# EAGLE board GS - Edge (EAGLE 9.7.0)

Size 154.23 x 121.79 mm. Coordinates in mm from the lower left corner, seen from the top.
Outline: 0,0 154.23,0 154.23,121.79 0,121.79 0,0
Copper layers (1*16): Top 0.035mm / dielectric 1.5mm / Bottom 0.035mm
Design rules "default": minimum track width 6mil, minimum drill 0.35mm, track to track 6mil, track to pad 6mil, pad to pad 6mil, via to via 6mil, smd to smd 6mil, copper to edge 40mil, drill to drill 6mil, minimum pad ring 10mil, minimum via ring 8mil, stop-mask expansion 4mil, vias tented up to drill 0mil, thermal gap 10mil

## Footprints (pad centres in the part's own frame; a part is rotated, then mirrored left to right if it is on the bottom)
LEDRD254W60D565H860B_Y = drill 0.981 pad 1.581: 1 -1.27,0; 2 1.27,0
LEDRD254W60D565H860B = drill 0.981 pad 1.581: 1 -1.27,0; 2 1.27,0
LEDRD254W60D565H860B_G = drill 0.981 pad 1.581: 1 -1.27,0; 2 1.27,0
MQ-XX-SOCKET = drill 1.27: 1 -6.223,6.223; 2 -8.788,0; 3 -6.223,-6.223; 4 6.223,-6.223; 5 8.788,0; 6 6.223,6.223
PIEZO = drill 1 pad 1.6: 1 -3.5,0; 2 3.5,0
RESAD1016W63L850D250B = drill 0.83 pad 1.43: 1 -5.08,0; 2 5.08,0
HA-06-SM065 = drill 1 pad 1.676: 1 -2.54,-2.54; 2 0,2.54; 3 2.54,-2.54
ARDUINO-UNO-R3-SHIELD = drill 1.016 pad 1.88: 3.3V 24.13,-2.54; 5V 24.13,0; A0 24.13,12.7; A1 24.13,15.24; A2 24.13,17.78; A3 24.13,20.32; A4 24.13,22.86; A5 24.13,25.4; AREF -24.13,-13.97; D2 -24.13,20.32; D3 -24.13,17.78; D4 -24.13,15.24; D5 -24.13,12.7; D6 -24.13,10.16; D7 -24.13,7.62; D8 -24.13,3.81; D9 -24.13,1.27; D10 -24.13,-1.27; D11 -24.13,-3.81; D12 -24.13,-6.35; D13 -24.13,-8.89; GND@0 24.13,2.54; GND@1 24.13,5.08; GND@2 -24.13,-11.43; IOREF 24.13,-7.62; NC 24.13,-10.16; RES 24.13,-5.08; RX -24.13,25.4; SCL -24.13,-19.05; SDA -24.13,-16.51; TX -24.13,22.86; VIN 24.13,7.62

## Placement (x,y rotation side)
D1  YELLOW  [LEDRD254W60D565H860B_Y]  90.47,84.88 180 top
D2  RED  [LEDRD254W60D565H860B]  82.86,84.88 180 top
D3  GREEN  [LEDRD254W60D565H860B_G]  98.09,84.88 180 top
GAS1  GAS-SENSORMQ-XX-SOCKET  [MQ-XX-SOCKET]  140,93.77 270 top
PIEZO1  PIEZO  [PIEZO]  11.73,89.96 0 top
R1  1k  [RESAD1016W63L850D250B]  134.93,112.82 90 top
R2  220  [RESAD1016W63L850D250B]  96.83,77.26 90 top
R3  220  [RESAD1016W63L850D250B]  89.2,77.26 90 top
R4  220  [RESAD1016W63L850D250B]  81.58,77.26 90 top
RPOT1  250k  [HA-06-SM065]  61.27,89.96 0 top
U1  ARDUINO-UNO-R3-SHIELD  [ARDUINO-UNO-R3-SHIELD]  100.56,29.84 270 top

## Library data of the parts
D1 = Tinkercad; CATEGORY: Opto-Electronic; SUB-CATEGORY: LED; VALUE: LED_YELLOW
D2 = Tinkercad; CATEGORY: Opto-Electronic; SUB-CATEGORY: LED; VALUE: LED_RED
D3 = Tinkercad; CATEGORY: Opto-Electronic; SUB-CATEGORY: LED; VALUE: LED_GREEN
GAS1 PIEZO1 R1-R4 RPOT1 U1 = Tinkercad

## Nets
D1_C: D1.2 R3.2
D2_C: D2.2 R4.2
D3_C: D3.2 R2.2
U1_5V: GAS1.4 GAS1.5 GAS1.6 RPOT1.3 U1.5V
U1_A0: GAS1.1 GAS1.3 R1.1 U1.A0
U1_A1: RPOT1.2 U1.A1
U1_D8: D3.1 U1.D8
U1_D9: D1.1 U1.D9
U1_D10: D2.1 U1.D10
U1_D13: PIEZO1.1 U1.D13
U1_GND: GAS1.2 PIEZO1.2 R1.2 R2.1 R3.1 R4.1 RPOT1.1 U1.GND@0 U1.GND@1 U1.GND@2

## Tracks (layer width: path | path; a pad name or v marks a point on that pad's centre or on a via)
D1_C  (1 unrouted)
D2_C  (1 unrouted)
D3_C  (1 unrouted)
U1_5V  (4 unrouted)
U1_A0  (3 unrouted)
U1_A1  (1 unrouted)
U1_D8  (1 unrouted)
U1_D9  (1 unrouted)
U1_D10  (1 unrouted)
U1_D13  (1 unrouted)
U1_GND  (9 unrouted)